# Altium PCB PCB_EPM7064SLC44_2.PCBDOC (part 1 of 2)
Units mil, origin at the board's own origin, x right, y up, seen from the top; angles counter-clockwise.
Board outline 2000 x 2000 mil, 2 copper layers (Top Layer, Bottom Layer); 30 components, 43 nets, 175 pads, 47 vias.
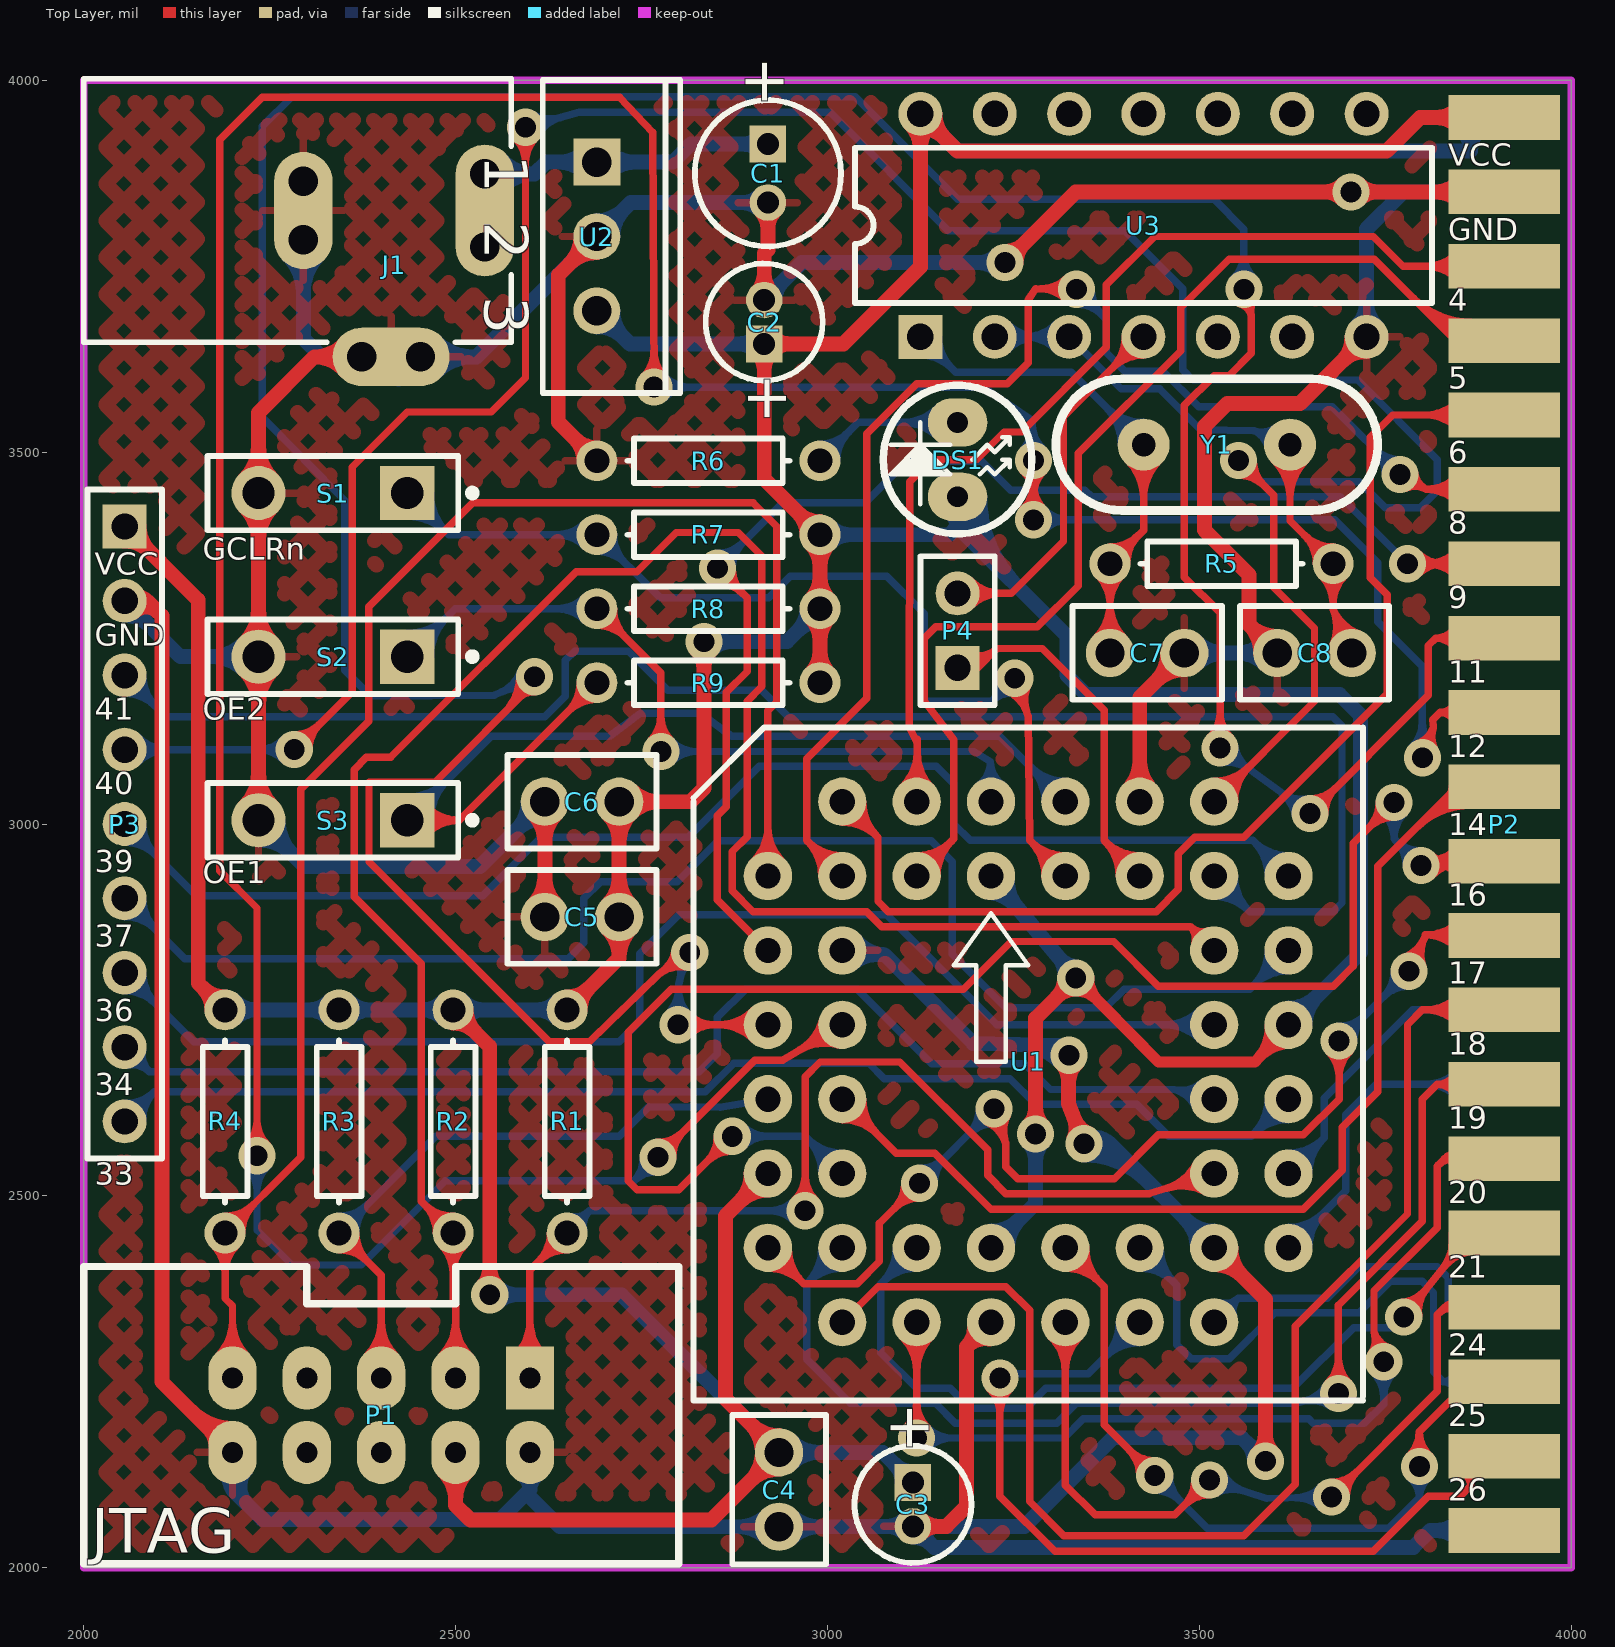
[diagram p0: Top Layer view]
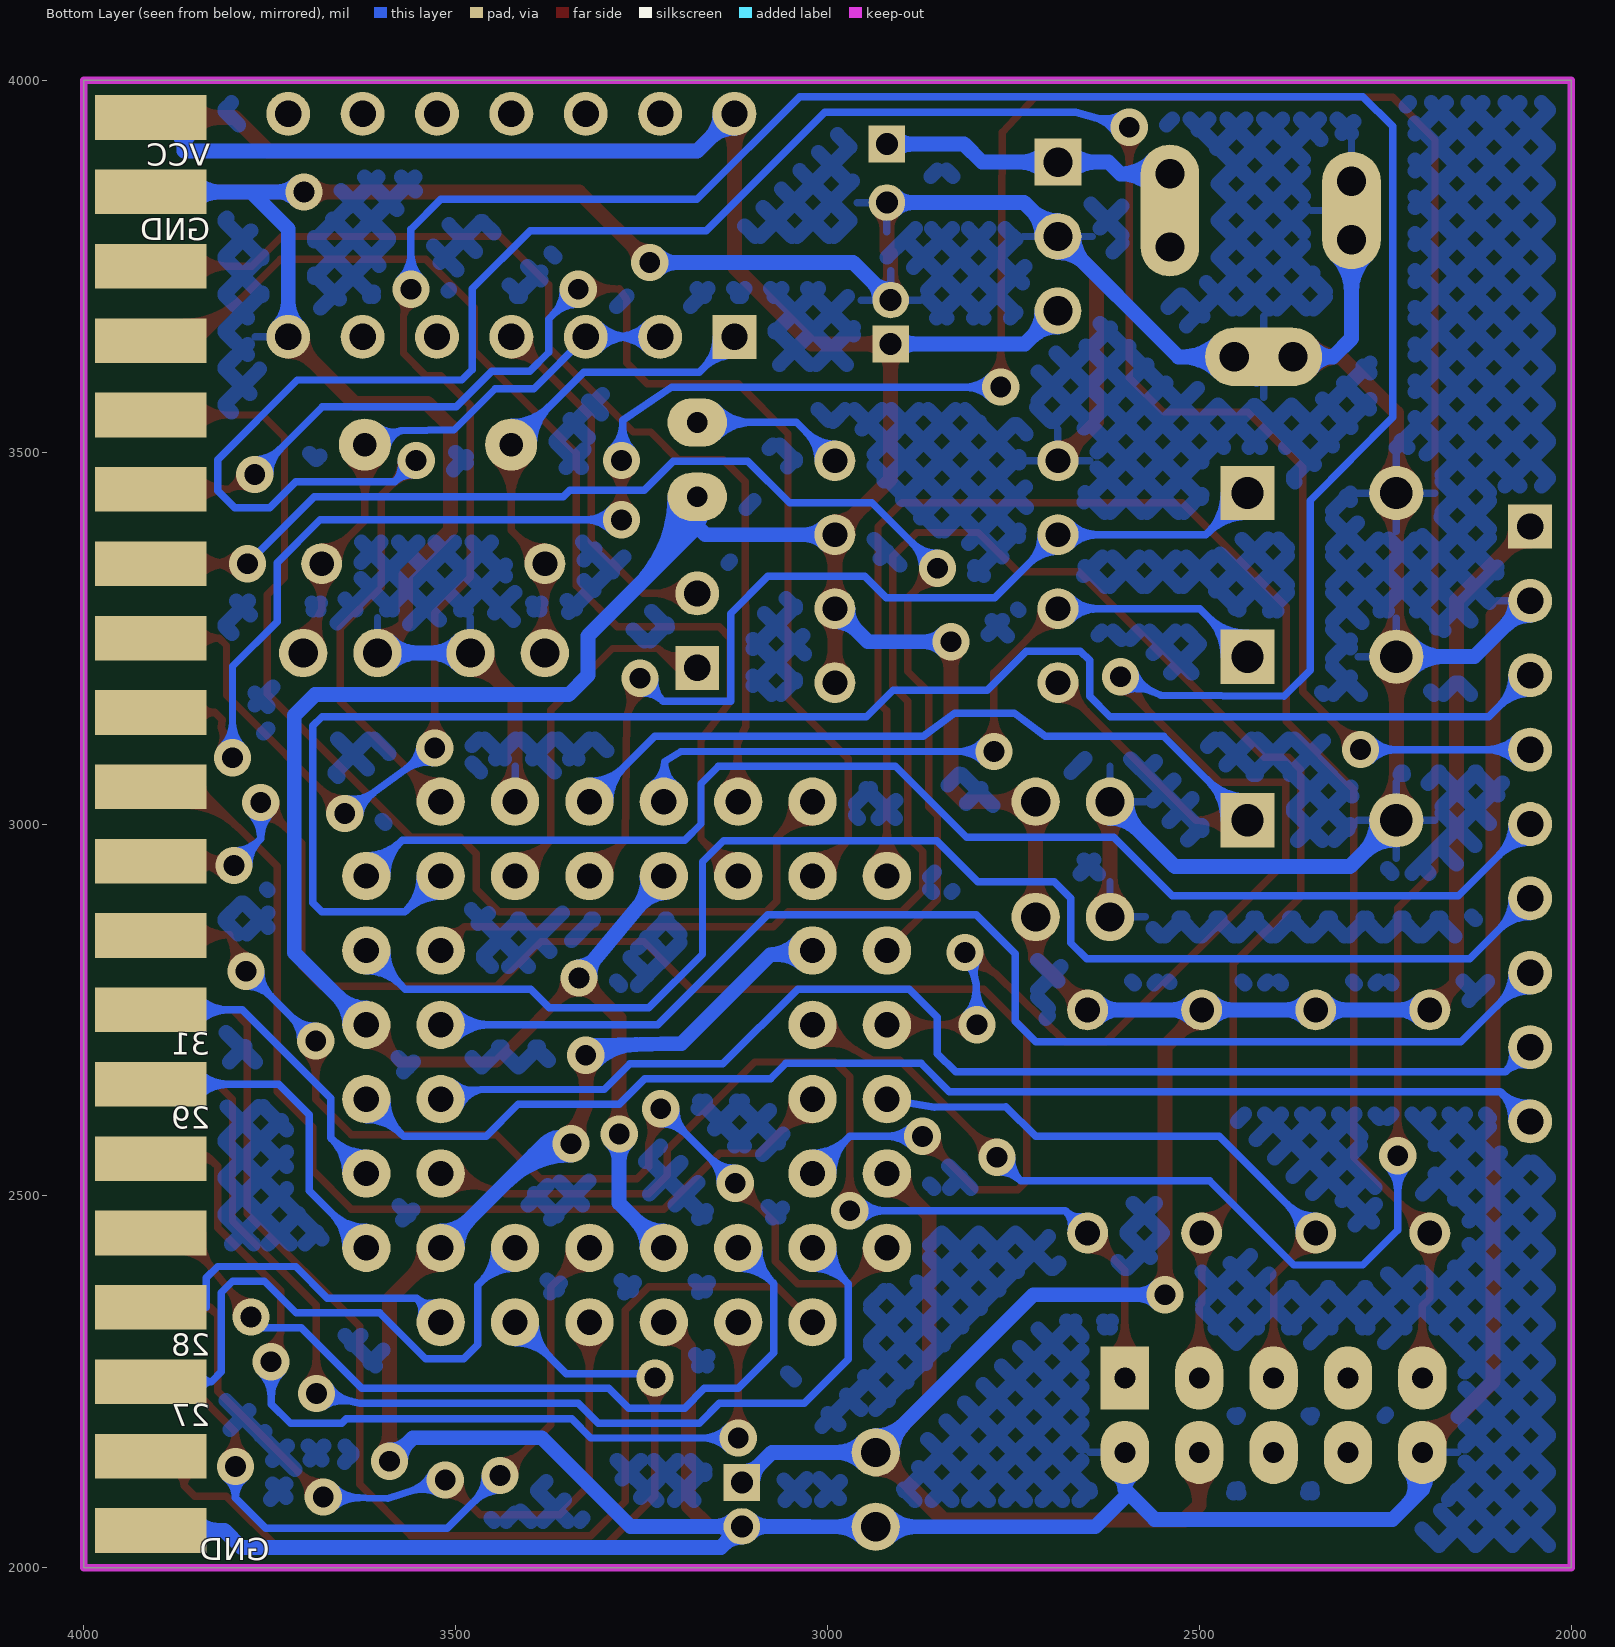
[diagram p1: Bottom Layer view, seen from below]

## Layer stack, top to bottom
Top Layer: signal copper 1.4
Dielectric: dielectric 12.6, FR-4, Dk 4.8
Bottom Layer: signal copper 1.4

## Board outline
2000,2000 2000,4000 4000,4000 4000,2000

## Design rules (kind name [scope] priority, off if disabled: settings)
Clearance [All] p1: gap=10
ComponentClearance [All] p1: gap=10 collisioncheckmode=0
PolygonConnect [All] p1: connectstyle=Relief reliefconductorwidth=10 reliefentries=4 polygonreliefangle="90 Angle"
RoutingPriority RoutingPriority_2 [InNet('VCC')] p1: routingpriority=50
RoutingPriority RoutingPriority_1 [InNet('GND')] p2: routingpriority=60
RoutingPriority [All] p3: routingpriority=0
RoutingVias [All] p1: holewidth=28 width=50 viastyle="Through Hole" minholewidth=28 minwidth=50 maxholewidth=28 maxwidth=50
SolderMaskExpansion [All] p1: expansion=4
TestPointUsage [All] p1: valid=0 allowmultiple=FALSE
Testpoint [All] p1: side=15 testpointundercomponent=TRUE minsize=40 maxsize=100 preferedsize=60 minholesize=0 maxholesize=40 preferedholesize=32 testpointgrid=1 style=1023 order=1234567890
Width Width_3 [InNet('NetC1_1')] p1: maxlimit=20 minlimit=20 preferedwidth=20
Width Width_2 [InNet('VCC')] p2: maxlimit=20 minlimit=10 preferedwidth=20
Width Width_1 [InNet('GND')] p3: maxlimit=20 minlimit=9 preferedwidth=20
Width [All] p4: maxlimit=10 minlimit=10 preferedwidth=10
16 further rules are at their usual default settings.

## Components (designator, comment, footprint, x,y, rotation, side; value= is the part's Value field where it differs from the comment)
C1 "470uF" CAPPR2-5x6.8 2920,3875 r270 top
C2 "22uF" CAPPR1.5-4x5 2915,3675 r90 top
C3 "10uF" CAPPR1.5-4x5 3115,2085 r270 top
C4 "0.1uF" CAPR2.54-5.1x3.2 2935,2105 r90 top
C5 "0.1uF" CAPR2.54-5.1x3.2 2670,2875 r0 top
C6 "0.1uF" CAPR2.54-5.1x3.2 2670,3030 r0 top
C7 "30pF" CAPR2.54-5.1x3.2 3430,3230 r180 top
C8 "30pF" CAPR2.54-5.1x3.2 3655,3230 r0 top
DS1 "LED_CPLD" LED 3175,3440 r90 top
J1 "POWER" KLD-0202 2000,3825 r0 top
P1 "JTAG" HEADER-5X2POL 2600,2255 r180 top
P2 "HEAD40" DBZ2 3910,2950 r90 top
P3 "Header 9" HDR1X9 2055,3400 r270 top
P4 "Header 2" HDR1X2 3175,3210 r90 top
R1 "1K" AXIAL-0.3 2650,2600 r270 top
R2 "1K" AXIAL-0.3 2496.67,2600 r270 top
R3 "1K" AXIAL-0.3 2343.33,2600 r270 top
R4 "1K" AXIAL-0.3 2190,2600 r270 top
R5 "1M" AXIAL-0.3 3530,3350 r0 top
R6 "340" AXIAL-0.3 2840,3488.46 r180 top
R7 "1K" AXIAL-0.3 2840,3388.98 r0 top
R8 "1K" AXIAL-0.3 2840,3289.49 r0 top
R9 "1K" AXIAL-0.3 2840,3190 r0 top
S1 "SW-PB" SPST-2 2335,3445 r180 top
S2 "SW-PB" SPST-2 2335,3225 r180 top
S3 "SW-PB" SPST-2 2335,3005 r180 top
U1 "EPM7064SLC44-10" PLCC_44 3220,3030 r0 top
U2 "7805" KC03 2690,3790 r270 top
U3 "SN74LS04N" N014 3425,3805 r0 top
Y1 "1~20M" XT2 3425,3510 r0 top

## Footprints (in the part's own frame and the unit in brackets; to place one, negate y for a bottom-side part, rotate by r counter-clockwise, add the part's x,y. Pads: shape width x height; smd on the part's side, far side on the other; paste and mask are expansions set on the pad)
AXIAL-0.3 [mm] "Resistor; 2 Leads"
  round 1.4 hole 0.85: 1(-3.81,0) 2(3.81,0)
  silkscreen extent -2.77,-0.76 2.77,0.76
CAPPR1.5-4x5 [mm] "Capacitor, Electrolytic, Radial; Body 4 x 5 mm (Dia.xH typ); Pin Spacing 1.5 mm (typ)"
  rect 1.25x1.25 hole 0.75: 1(-0.75,0)
  round 1.25 hole 0.75: 2(0.75,0)
  silkscreen extent -2,-2 2,2
CAPPR2-5x6.8 [mm] "Capacitor, Electrolytic, Radial; Body 5 x 6.8 mm (Dia.xH typ); Pin Spacing 2 mm (typ)"
  rect 1.25x1.25 hole 0.75: 1(-1,0)
  round 1.25 hole 0.75: 2(1,0)
  silkscreen extent -2.5,-2.5 2.5,2.5
CAPR2.54-5.1x3.2 [mm] "Capacitor, Ceramic, Thru-Hole, Dipped Radial; Body 5.1 x 3.2 mm (WxT) Pin Spacing 2.54 mm (typ)"
  round 1.65 hole 1: 1(-1.27,0) 2(1.27,0)
  silkscreen extent -2.55,-1.6 2.55,1.6
DBZ2 [mil]
  rect 60x150 smd: 1(1000,0) 2(900,0) 3(800,0) 4(700,0) 5(600,0) 6(500,0) 7(400,0) 8(300,0) 9(200,0) 10(100,0) 11(0,0) 12(-100,0) 13(-200,0) 14(-300,0) 15(-400,0) 16(-500,0) 17(-600,0) 18(-700,0) 19(-800,0) 20(-900,0)
  rect 60x150 smd far side: 21(1000,0) 22(900,0) 23(800,0) 24(700,0) 25(600,0) 26(500,0) 27(400,0) 28(300,0) 29(200,0) 30(100,0) 31(0,0) 32(-100,0) 33(-200,0) 34(-300,0) 35(-400,0) 36(-500,0) 37(-600,0) 38(-700,0) 39(-800,0) 40(-900,0)
HDR1X2 [mm] "Connector; Header; 2 Position"
  rect 1.5x1.5 hole 0.9: 1(0,0)
  round 1.5 hole 0.9: 2(2.54,0)
  silkscreen extent -1.27,-1.27 3.81,1.27
HDR1X9 [mm] "Connector; Header; 9 Position"
  rect 1.5x1.5 hole 0.9: 1(0,0)
  round 1.5 hole 0.9: 2(2.54,0) 3(5.08,0) 4(7.62,0) 5(10.16,0) 6(12.7,0) 7(15.24,0) 8(17.78,0) 9(20.32,0)
  silkscreen extent -1.27,-1.27 21.59,1.27
HEADER-5X2POL [mil]
  rect 65x85 hole 28: 1(0,0)
  oval 65x85 hole 28: 2(0,100) 3(100,0) 4(100,100) 5(200,0) 6(200,100) 7(300,0) 8(300,100) 9(400,0) 10(400,100)
  silkscreen extent -200,-150 600,250
KC03 [mm] "TO, Thru-Hole, Vertical, Heatsink Mounted; 3 In-Line Leads; Pitch 2.54 mm"
  rect 1.6x1.6 hole 1: 1(-2.54,0)
  round 1.6 hole 1: 2(0,0) 3(2.54,0)
  silkscreen extent -5.35,-1.85 5.35,2.85
KLD-0202 [mm] "DC Power Jack, 2.5mm, KLD Series, PCB Mount"
  oval 2x4.5 all layers, no hole: 1(13.7,0)
  round 1.5 hole 1: 1A(13.7,-1.25) 1B(13.7,1.25) 2A(7.5,-1) 2B(7.5,1) 3A(9.5,-5) 3B(11.5,-5)
  oval 2x4 all layers, no hole: 2(7.5,0)
  oval 4x2 all layers, no hole: 3(10.5,-5)
  silkscreen extent 0,-4.5 14.6,4.5
LED [mil]
  oval 65x80 hole 28: 1(0,0) 2(100,0)
  silkscreen extent -50,-100 150,100
N014 [mm] "DIP; 14 Leads; Row Spacing 7.62 mm; Pitch 2.54 mm"
  rect 1.5x1.5 hole 0.9: 1(-7.62,-3.81)
  round 1.5 hole 0.9: 2(-5.08,-3.81) 3(-2.54,-3.81) 4(0,-3.81) 5(2.54,-3.81) 6(5.08,-3.81) 7(7.62,-3.81) 8(7.62,3.81) 9(5.08,3.81) 10(2.54,3.81) 11(0,3.81) 12(-2.54,3.81) 13(-5.08,3.81) 14(-7.62,3.81)
  silkscreen extent -9.85,-2.65 9.85,2.65
PLCC_44 [mil]
  round 65 hole 34: 1(100,-100) 2(0,0) 3(0,-100) 4(-100,0) 5(-100,-100) 6(-200,0) 7(-300,-100) 8(-200,-100) 9(-300,-200) 10(-200,-200) 11(-300,-300) 12(-200,-300) 13(-300,-400) 14(-200,-400) 15(-300,-500) 16(-200,-500) 17(-300,-600) 18(-200,-700) 19(-200,-600) 20(-100,-700) 21(-100,-600) 22(0,-700) 23(0,-600) 24(100,-700) 25(100,-600) 26(200,-700) 27(200,-600) 28(300,-700) 29(400,-600) 30(300,-600) 31(400,-500) 32(300,-500) 33(400,-400) 34(300,-400) 35(400,-300) 36(300,-300) 37(400,-200) 38(300,-200) 39(400,-100) 40(300,0) 41(300,-100) 42(200,0) 43(200,-100) 44(100,0)
  silkscreen extent -400,-805 500,100
SPST-2 [mm] "Circuit Breaker; 2 Leads"
  rect 1.85x1.85 hole 1.1: 1(-2.54,0)
  round 1.85 hole 1.1: 2(2.54,0)
  silkscreen extent -4.89,-1.27 4.28,1.27
XT2 [mil]
  round 70 hole 31.5: 1(0.19,0.09) 2(197.04,0.09)
  silkscreen extent -118,-88 315,89

## Part data
C1 C2 C3: library part "Cap Pol1", "Polarized Capacitor (Radial)"
C4 C5 C6 C7 C8: library part Cap, "Capacitor"
DS1: library part LED0, "Typical INFRARED GaAs LED"
J1: library part PWR2.5, "Low Voltage Power Supply Connector"
P1: library part "Header 5X2", "Header, 5-Pin, Dual row"
P3: "Header, 9-Pin"
P4: "Header, 2-Pin"
R1 R2 R3 R4 R5 R6 R7 R8 R9: library part Res1, "Resistor"
S1 S2 S3: "Switch"
U1: "MAX 7000S 5V In-System Programmable CPLD, 64 Macrocells, 44-Pin PLCC, Speed Grade 10, Commercial Grade"
U2: library part LM330KC, "3-Terminal Positive Regulator"
U3: "Hex Inverter"
Y1: library part XTAL, "Crystal Oscillator"

## Via types
v1: diameter 50, hole 28, Top Layer to Bottom Layer, 47 vias

## Nets (pads, with @x,y where several pads share a name; then routed paths per layer and width w, separated by ;. In a path a pad name is that pad's centre, name@x,y a point inside that pad or via, vN(x,y) a via of type N, cw(c..) or ccw(c..) an arc to the next point about the centre after c; other vN are vias at no path point)
4: P2.3 U1.4 | length 1765
  Top Layer w10: U1.4@3100.79,3049.68 ccw(c3054.4,3097.18) 3120.79,3096.39 ccw(c3187.18,3095.6) U1.4@3139.68,3049.21 ; U1.4@3107.77,3042.52 ccw(c3078.26,3072.75) 3120.5,3072.25 ccw(c3162.75,3071.74) U1.4@3132.52,3042.23 ; U1.4@3120,3030 3120.95,3109.99 3121,3114 3120,3110 3110,3131 3110.47,3460.47 3140,3490 3200.35,3490 3237.44,3527.09 3261.09,3527.09 3375,3641 3375,3725 3440,3790 3734,3790 3774,3750 P2.3@3910,3750 ; P2.3@3847.32,3732.32 ccw(c3804.64,3689.64) 3804.64,3750 ccw(c3804.64,3810.36) P2.3@3847.32,3767.68 ; P2.3@3854.39,3739.39 ccw(c3828.79,3713.79) 3828.79,3750 ccw(c3828.79,3786.21) P2.3@3854.39,3760.61
5: P2.4 U1.5 | length 1898.5
  Top Layer w10: U1.5@3120,2930 3170,2980 3170,3113 3130.47,3165 3130.47,3250 3145.47,3265 3282.44,3265 3337.44,3320 3337.44,3498.44 3475,3636 3475,3694.53 3540,3759.53 3735.47,3759.53 3845,3650 P2.4@3910,3650 ; U1.5@3120,2947.5 ccw(c3120,2989.75) 3149.87,2959.87 ccw(c3179.75,2930) U1.5@3137.5,2930 ; U1.5@3120,2957.5 ccw(c3120,3023.89) 3166.95,2976.95 ccw(c3213.89,2930) U1.5@3147.5,2930 ; 3788.18,3706.82 ccw(c3865,3783.64) P2.4@3865,3675 ; 3805.25,3689.75 ccw(c3865,3749.5) P2.4@3865,3665 ; 3822.32,3672.68 ccw(c3865,3715.36) P2.4@3865,3655
6: P2.5 U1.6 | length 1863.5
  Top Layer w10: U1.6@3020,3002.5 cw(c3020,2936.11) 3066.95,2983.05 cw(c3113.89,3030) U1.6@3047.5,3030 ; U1.6@3020,3012.5 cw(c3020,2970.25) 3049.87,3000.13 cw(c3079.75,3030) U1.6@3037.5,3030 ; U1.6@3020,3030 3068,2982 3068,2896 3082,2882 3442,2882 3472,2912 3472,2960 3494,2982 3560,2982 3753,3175 3753,3308 3730,3331 3730,3520 3760,3550 P2.5@3910,3550 ; P2.5@3847.32,3532.32 ccw(c3804.64,3489.64) 3804.64,3550 ccw(c3804.64,3610.36) P2.5@3847.32,3567.68 ; P2.5@3854.39,3539.39 ccw(c3828.79,3513.79) 3828.79,3550 ccw(c3828.79,3586.21) P2.5@3854.39,3560.61
8: P2.6 U1.8 | length 2377.6
  Top Layer w10: U1.8@2992.5,2930 ccw(c2926.11,2930) 2973.05,2976.95 ccw(c3020,3023.89) U1.8@3020,2957.5 ; U1.8@3002.5,2930 ccw(c2960.25,2930) 2990.13,2959.87 ccw(c3020,2989.75) U1.8@3020,2947.5 ; U1.8@3020,2930 2972,2978 2972,3088 3053,3169 3053,3525 3120,3592 3242,3592 3270,3620 3270,3705 3280,3720 v1(3335,3719) ; v1@3320.6,3705.12 ccw(c3285.85,3671.6) 3286.72,3719.88 ccw(c3287.6,3768.15) v1@3321.12,3733.4 ; v1(3770,3470) 3805,3450 ; v1@3777.83,3451.59 cw(c3789.81,3423.41) 3805,3450 ; v1@3789.83,3472.6 ccw(c3820.19,3476.59) 3805,3450 ; P2.6@3847.25,3432.4 ccw(c3805,3390.51) 3805,3450 ; P2.6@3847.25,3467.6 cw(c3805,3509.49) 3805,3450 ; P2.6@3854.35,3439.44 ccw(c3829,3414.3) 3829,3450 ccw(c3829,3485.7) P2.6@3854.35,3460.56 ; P2.6@3910,3450 3805,3450
  Bottom Layer w10: v1@3335,3699 cw(c3335,3650.72) 3369.14,3684.86 cw(c3403.28,3719) v1@3355,3719 ; v1(3335,3719) 3375,3679 3375,3634 3400,3609 3451.29,3609 3499.29,3561 3679,3561 v1(3770,3470) ; v1@3750,3470 ccw(c3701.72,3470) 3735.86,3504.14 ccw(c3770,3538.28) v1@3770,3490
9: P2.7 U1.9 | length 2129.3
  Top Layer w10: v1@2852,3324 cw(c2852,3275.72) 2886.14,3309.86 cw(c2920.28,3344) v1@2872,3344 ; v1(2852,3344) 2892,3304 2892,3205.11 2863.97,3177.07 2863.97,3022.96 2852,3010.99 2852,2898 U1.9@2920,2830 ; v1(3780,3350) P2.7@3910,3350 ; v1@3794.14,3335.86 cw(c3828.28,3301.72) 3828.28,3350 cw(c3828.28,3398.28) v1@3794.14,3364.14 ; P2.7@3847.32,3332.32 ccw(c3804.64,3289.64) 3804.64,3350 ccw(c3804.64,3410.36) P2.7@3847.32,3367.68 ; P2.7@3854.39,3339.39 ccw(c3828.79,3313.79) 3828.79,3350 ccw(c3828.79,3386.21) P2.7@3854.39,3360.61
  Bottom Layer w10: v1(2852,3344) 2940,3432 3051,3432 3107,3488 3207.46,3488 3246.46,3449 3346.28,3449 3355.19,3440.09 3689.91,3440.09 v1(3780,3350) ; v1@2852,3364 ccw(c2852,3412.28) 2886.14,3378.14 ccw(c2920.28,3344) v1@2872,3344
11: P2.8 U1.11 | length 6101.3
  Top Layer w10: 2566.2,3150.2 ccw(c2518.4,3198) v1@2586,3198 ; 2583.27,3167.27 ccw(c2552.54,3198) v1@2596,3198 ; 2585.51,3169.51 cw(c2606,3149.03) v1@2606,3178 ; v1(2606,3198) 2606,3190 2472.42,3056.42 2383.58,3056.42 2383.58,2949.42 2626,2707 2680,2707 2773,2798 v1(2815,2827) ; v1@2795.33,2830.6 cw(c2747.83,2839.3) 2775.27,2799.57 cw(c2802.7,2759.83) v1@2811.4,2807.33 ; v1(2799,2730) U1.11@2920,2730 ; v1@2813.14,2715.86 cw(c2847.28,2681.72) 2847.28,2730 cw(c2847.28,2778.28) v1@2813.14,2744.14 ; U1.11@2900.55,2710.55 ccw(c2853.61,2663.61) 2853.61,2730 ccw(c2853.61,2796.39) U1.11@2900.55,2749.45 ; U1.11@2907.63,2717.63 ccw(c2877.75,2687.75) 2877.75,2730 ccw(c2877.75,2772.25) U1.11@2907.63,2742.37 ; v1@3513.86,3116.14 ccw(c3479.72,3150.28) 3528,3150.28 ccw(c3576.28,3150.28) v1@3542.14,3116.14 ; v1(3528,3102) 3528,3284 3480,3332 3480,3563 3520,3603 3540,3603 3570,3633 3570,3684 ; v1@3554.33,3699.82 cw(c3547.77,3677.65) 3570,3684 ; v1(3560,3719) 3570,3684 ; v1@3574.95,3705.71 ccw(c3592.23,3690.35) 3570,3684 ; v1(3649,3014) 3808,3173 3808,3240 3818,3250 ; v1@3649,3034 ccw(c3649,3082.28) 3683.14,3048.14 ccw(c3717.28,3014) v1@3669,3014 ; P2.8@3844.27,3236.03 ccw(c3818,3218.32) 3818,3250 ; P2.8@3844.27,3263.97 cw(c3818,3281.68) 3818,3250 ; P2.8@3910,3250 3818,3250
  Bottom Layer w10: v1@2587.23,3204.89 cw(c2541.9,3221.53) 2562.18,3177.71 cw(c2582.47,3133.9) v1@2599.11,3179.23 ; v1(2606,3198) 2552,3173 2386,3172 2351,3207 2351,3435 2240,3547 2240,3938 2280,3978 3037.32,3978 3175.32,3840 3520,3840 3560,3800 v1(3560,3719) ; v1@2785.12,2744.4 ccw(c2751.62,2779.17) 2799.89,2778.28 ccw(c2848.17,2777.38) v1@2813.4,2743.88 ; v1@2798.02,2816.43 cw(c2771.15,2799.7) 2801.98,2792.53 ; v1(2799,2730) 2800,2784 2810,2827 v1(2815,2827) ; 2802.12,2793.14 cw(c2841.83,2783.9) v1@2820.29,2818.51 ; v1(3528,3102) v1(3649,3014) ; v1@3531.12,3082.24 cw(c3538.65,3034.55) 3567.05,3073.6 cw(c3595.45,3112.65) v1@3547.76,3105.12 ; v1@3545.86,3733.14 ccw(c3511.72,3767.28) 3560,3767.28 ccw(c3608.28,3767.28) v1@3574.14,3733.14 ; v1@3629.24,3010.88 ccw(c3581.55,3003.35) 3609.95,3042.4 ccw(c3638.35,3081.45) v1@3645.88,3033.76
12: P2.9 U1.12 | length 6081
  Top Layer w10: v1@2218.86,2568.14 ccw(c2184.72,2602.28) 2233,2602.28 ccw(c2281.28,2602.28) v1@2247.14,2568.14 ; v1(2233,2554) 2233,2887 2183,2937 2183,3920 2240,3977 2721,3977 2765,3930 v1(2767,3587.5) ; v1@2752.78,3601.56 ccw(c2718.43,3635.5) 2766.72,3635.78 ccw(c2815,3636.07) v1@2781.06,3601.72 ; v1(2772,2552) 2902.5,2682.5 2939.68,2682.5 U1.12@3020,2730 ; v1@2772,2572 ccw(c2772,2620.28) 2806.14,2586.14 ccw(c2840.28,2552) v1@2792,2552 ; U1.12@2993.36,2736.84 cw(c2929.06,2753.35) 2962.85,2696.21 cw(c2996.65,2639.06) U1.12@3013.16,2703.36 ; U1.12@3003.05,2734.35 cw(c2962.13,2744.86) 2983.63,2708.49 cw(c3005.14,2672.13) U1.12@3015.65,2713.05 ; v1@3262.86,3423.14 ccw(c3228.72,3457.28) 3277,3457.28 ccw(c3325.28,3457.28) v1@3291.14,3423.14 ; v1@3262.86,3474.86 cw(c3228.72,3440.72) 3277,3440.72 cw(c3325.28,3440.72) v1@3291.14,3474.86 ; v1(3277,3409) v1(3277,3489) ; v1@3792.94,3107.71 ccw(c3779.65,3142.93) 3815,3130 ; v1(3800,3089) 3815,3130 ; v1@3817.47,3098.74 cw(c3850.35,3117.06) 3815,3130 ; P2.9@3842.77,3138.55 ccw(c3824,3128.88) 3824,3150 ; P2.9@3842.77,3161.45 cw(c3824,3171.12) 3824,3150 ; P2.9@3910,3150 3824,3150 ; 3815,3130 3814,3140 3824,3150
  Bottom Layer w10: v1@2218.86,2539.86 cw(c2184.72,2505.72) 2233,2505.72 cw(c2281.28,2505.72) v1@2247.14,2539.86 ; v1(2233,2554) 2233,2454 2280,2407 2373,2407 2486,2520 2740,2520 ; v1@2752.02,2551.06 cw(c2710.87,2549.13) 2740,2520 ; v1(2767,3587.5) 3209.5,3587.5 3275,3543 v1(3277,3489) ; v1@2771.06,2532.02 ccw(c2769.13,2490.87) 2740,2520 ; v1(2772,2552) 2740,2520 ; v1@2781.14,3573.36 cw(c2815.28,3539.22) 2815.28,3587.5 cw(c2815.28,3635.78) v1@2781.14,3601.64 ; v1@3262.34,3502.61 ccw(c3226.96,3535.46) 3275.21,3537.25 ccw(c3323.46,3539.04) v1@3290.61,3503.66 ; v1(3277,3409) 3682.24,3409 3740,3351.24 3740,3272 3800,3212 v1(3800,3089) ; v1@3291.14,3394.86 cw(c3325.28,3360.72) 3325.28,3409 cw(c3325.28,3457.28) v1@3291.14,3423.14 ; v1@3785.86,3103.14 ccw(c3751.72,3137.28) 3800,3137.28 ccw(c3848.28,3137.28) v1@3814.14,3103.14
14: P2.10 U1.14 | length 1769.7
  Top Layer w10: U1.14@3020,2602.5 cw(c3020,2536.11) 3066.95,2583.05 cw(c3113.89,2630) U1.14@3047.5,2630 ; U1.14@3020,2612.5 cw(c3020,2570.25) 3049.87,2600.13 cw(c3079.75,2630) U1.14@3037.5,2630 ; U1.14@3020,2630 3092.5,2557.5 3144.5,2557.5 3220,2482 3640,2482 3692.15,2534.15 3692.15,2592.15 3740,2640 3740,2943 3847,3050 P2.10@3910,3050 ; 3791.59,2994.59 cw(c3865,2921.19) P2.10@3865,3025 ; 3808.67,3011.67 cw(c3865,2955.33) P2.10@3865,3035 ; 3825.74,3028.74 cw(c3865,2989.47) P2.10@3865,3045 ; P2.10@3835.05,3038.05 ccw(c3823.1,3050) P2.10@3840,3050
16: P2.11 U1.16 | length 2874.7
  Top Layer w10: v1@2852,2580 cw(c2803.72,2580) 2837.86,2545.86 cw(c2872,2511.72) v1@2872,2560 ; v1(2872,2580) 2800,2508 2744,2508 2732,2520 2732,2720 2790,2778 3183,2778 3247,2842 3385,2842 3445,2782 3680,2782 3707,2809 3707,2974 v1(3762,3029) ; v1@3742,3029 cw(c3693.72,3029) 3727.86,2994.86 cw(c3762,2960.72) v1@3762,3009 ; v1(3798,2944) 3804,2950 P2.11@3910,2950 ; v1@3805.07,2936.93 cw(c3836.63,2905.37) P2.11@3836.63,2950 ; v1@3812.14,2929.86 cw(c3860.77,2881.23) P2.11@3860.77,2950 ; v1@3812.14,2958.14 ccw(c3831.8,2977.8) 3831.8,2950 ; P2.11@3847.32,2932.32 ccw(c3804.64,2889.64) 3804.64,2950 ccw(c3804.64,3010.36) P2.11@3847.32,2967.68 ; P2.11@3854.39,2939.39 ccw(c3828.79,2913.79) 3828.79,2950 ccw(c3828.79,2986.21) P2.11@3854.39,2960.61
  Bottom Layer w10: v1(2872,2580) 2970,2580 U1.16@3020,2530 ; v1@2886.14,2565.86 cw(c2920.28,2531.72) 2920.28,2580 cw(c2920.28,2628.28) v1@2886.14,2594.14 ; U1.16@2992.5,2530 ccw(c2926.11,2530) 2973.05,2576.95 ccw(c3020,2623.89) U1.16@3020,2557.5 ; U1.16@3002.5,2530 ccw(c2960.25,2530) 2990.13,2559.87 ccw(c3020,2589.75) U1.16@3020,2547.5 ; v1@3747.86,3014.86 cw(c3713.72,2980.72) 3762,2980.72 cw(c3810.28,2980.72) v1@3776.14,3014.86 ; v1(3762,3029) 3762,2980 v1(3798,2944) ; v1@3778,2944 ccw(c3729.72,2944) 3763.86,2978.14 ccw(c3798,3012.28) v1@3798,2964
17: P2.12 U1.17 | length 2329.9
  Top Layer w10: U1.17@2920,2402.5 cw(c2920,2336.11) 2966.95,2383.05 cw(c3013.89,2430) U1.17@2947.5,2430 ; U1.17@2920,2412.5 cw(c2920,2370.25) 2949.87,2400.13 cw(c2979.75,2430) U1.17@2937.5,2430 ; U1.17@2920,2430 2968,2382 3040,2382 3070,2412 3070,2463 v1(3124,2517) ; v1@3104,2517 cw(c3055.72,2517) 3089.86,2482.86 cw(c3124,2448.72) v1@3124,2497 ; v1@3215.17,2599.05 cw(c3193.85,2555.73) 3239.56,2571.29 cw(c3285.27,2586.85) v1@3241.95,2608.17 ; v1(3224,2617) 3240,2570 3240,2539 3256,2523 3386,2523 3445,2582 3640,2582 3688,2630 v1(3688,2708) ; v1@3673.86,2693.86 cw(c3639.72,2659.72) 3688,2659.72 cw(c3736.28,2659.72) v1@3702.14,2693.86 ; v1@3775.21,2820.81 ccw(c3758.81,2866.23) 3802.52,2845.71 ccw(c3846.23,2825.19) v1@3800.81,2808.79 ; v1(3782,2802) 3805,2851 P2.12@3910,2850 ; 3803.62,2851.01 cw(c3803.03,2789.2) P2.12@3847.15,2832.49 ; 3805.69,2850.99 ccw(c3806.25,2909.88) P2.12@3847.49,2867.85 ; 3827.76,2850.78 cw(c3827.4,2813.11) P2.12@3854.29,2839.49 ; 3829.83,2850.76 ccw(c3830.16,2885.51) P2.12@3854.49,2860.71
  Bottom Layer w10: v1(3124,2517) v1(3224,2617) ; v1@3124,2537 ccw(c3124,2585.28) 3158.14,2551.14 ccw(c3192.28,2517) v1@3144,2517 ; v1@3204,2617 cw(c3155.72,2617) 3189.86,2582.86 cw(c3224,2548.72) v1@3224,2597 ; v1(3688,2708) v1(3782,2802) ; v1@3688,2728 ccw(c3688,2776.28) 3722.14,2742.14 ccw(c3756.28,2708) v1@3708,2708 ; v1@3762,2802 cw(c3713.72,2802) 3747.86,2767.86 cw(c3782,2733.72) v1@3782,2782
18: P2.13 U1.18 | length 1917.3
  Top Layer w10: U1.18@3020,2330 3068,2378 3240,2378 3272,2346 3272,2089 3318,2043 3560,2043 3629,2112 3629,2324.63 3780,2475.63 3780,2730 3800,2750 P2.13@3910,2750 ; P2.13@3847.32,2732.32 ccw(c3804.64,2689.64) 3804.64,2750 ccw(c3804.64,2810.36) P2.13@3847.32,2767.68 ; P2.13@3854.39,2739.39 ccw(c3828.79,2713.79) 3828.79,2750 ccw(c3828.79,2786.21) P2.13@3854.39,2760.61
19: P2.14 U1.19 | length 1873
  Top Layer w10: v1@3673.05,2248.34 ccw(c3638.91,2282.48) 3687.2,2282.48 ccw(c3735.48,2282.48) v1@3701.34,2248.34 ; v1(3687.2,2234.2) 3687.2,2352.8 3800,2465.61 3800,2630 3820,2650 ; P2.14@3843.77,2636.79 ccw(c3820,2622) 3820,2650 ; P2.14@3843.77,2663.21 cw(c3820,2678) 3820,2650 ; P2.14@3910,2650 3820,2650
  Bottom Layer w10: U1.19@2992.5,2430 cw(c2926.11,2430) 2973.05,2383.05 cw(c3020,2336.11) U1.19@3020,2402.5 ; U1.19@3002.5,2430 cw(c2960.25,2430) 2990.13,2400.13 cw(c3020,2370.25) U1.19@3020,2412.5 ; U1.19@3020,2430 2972,2382 2972,2280 3031,2221 3145.38,2221 3172,2194.38 3308.21,2194.38 3334.83,2221 3629,2221 v1(3687.2,2234.2) ; v1@3670.28,2244.86 cw(c3629.43,2270.61) 3640.11,2223.52 cw(c3650.78,2176.43) v1@3676.53,2217.28
20: P2.15 U1.20 | length 1834.2
  Top Layer w10: U1.20@3100.55,2310.55 cw(c3053.61,2263.61) 3120,2263.61 cw(c3186.39,2263.61) U1.20@3139.45,2310.55 ; v1@3105.86,2188.52 ccw(c3071.72,2222.67) 3120,2222.67 ccw(c3168.28,2222.67) v1@3134.14,2188.52 ; U1.20@3107.63,2317.63 cw(c3077.75,2287.75) 3120,2287.75 cw(c3162.25,2287.75) U1.20@3132.37,2317.63 ; v1(3120,2174.38) U1.20@3120,2330 ; v1@3731.2,2287.85 ccw(c3702.46,2306.42) 3735,2317 ; v1(3748,2277) 3735,2317 ; v1@3755.21,2295.66 cw(c3767.55,2327.58) 3735,2317 ; 3820.59,2540.59 cw(c3844.78,2516.4) P2.15@3862.42,2545.72 ; 3829.64,2549.64 cw(c3851.58,2527.69) P2.15@3867.58,2554.28 ; P2.15@3841.35,2541.89 ccw(c3830,2538) 3830,2550 ; P2.15@3841.35,2558.11 cw(c3830,2562) 3830,2550 ; P2.15@3910,2550 3830,2550 ; 3735,2317 3735,2372.32 3820,2457.32 3820,2540 3830,2550
  Bottom Layer w10: v1(3120,2174.38) 3318.21,2174.38 3343.83,2200 3647,2200 3653,2194 3722,2194 3748,2220 v1(3748,2277) ; v1@3134.14,2160.24 cw(c3168.28,2126.1) 3168.28,2174.38 cw(c3168.28,2222.67) v1@3134.14,2188.52 ; v1@3733.86,2262.86 cw(c3699.72,2228.72) 3748,2228.72 cw(c3796.28,2228.72) v1@3762.14,2262.86
21: P2.16 U1.21 | length 1566.6
  Top Layer w10: v1@3772.86,2356.89 ccw(c3767.7,2404.89) 3805.3,2374.6 ccw(c3842.89,2344.3) v1@3794.89,2339.14 ; v1(3775,2337) 3840,2417.66 3840,2450 P2.16@3910,2450 ; 3826.52,2400.93 ccw(c3777.32,2440.57) P2.16@3840.14,2447.33 ; 3829.03,2404.04 cw(c3873.82,2367.94) P2.16@3867.67,2425.14 ; 3841.67,2419.73 ccw(c3811.27,2444.22) P2.16@3850.09,2448.4 ; P2.16@3842.73,2438.63 cw(c3826.13,2430.16) 3840.65,2418.46 cw(c3856.16,2405.96) P2.16@3860.08,2425.49
  Bottom Layer w10: U1.21@3092.5,2430 cw(c3026.11,2430) 3073.05,2383.05 cw(c3120,2336.11) U1.21@3120,2402.5 ; U1.21@3102.5,2430 cw(c3060.25,2430) 3090.13,2400.13 cw(c3120,2370.25) U1.21@3120,2412.5 ; U1.21@3120,2430 3072,2382 3072,2289 3120,2241 3165.38,2241 3192,2214.38 3267.21,2214.38 3293.83,2241 3626,2241 3707.5,2322.5 3760.5,2322.5 v1(3775,2337)
24: P2.17 U1.24 | length 1605.4
  Top Layer w10: U1.24@3300.55,2310.55 cw(c3253.61,2263.61) 3320,2263.61 cw(c3386.39,2263.61) U1.24@3339.45,2310.55 ; U1.24@3307.63,2317.63 cw(c3277.75,2287.75) 3320,2287.75 cw(c3362.25,2287.75) U1.24@3332.37,2317.63 ; U1.24@3320,2330 3320,2111 3360,2071 3467,2071 v1(3514,2118) ; v1@3494,2118 cw(c3445.72,2118) 3479.86,2083.86 cw(c3514,2049.72) v1@3514,2098 ; v1(3678,2095) 3820,2237 3820,2340 3830,2350 ; v1@3678,2115 ccw(c3678,2163.28) 3712.14,2129.14 ccw(c3746.28,2095) v1@3698,2095 ; 3820.59,2340.59 cw(c3844.78,2316.4) P2.17@3862.42,2345.72 ; 3829.64,2349.64 cw(c3851.58,2327.69) P2.17@3867.58,2354.28 ; P2.17@3841.35,2341.89 ccw(c3830,2338) 3830,2350 ; P2.17@3841.35,2358.11 cw(c3830,2362) 3830,2350 ; P2.17@3910,2350 3830,2350
  Bottom Layer w10: v1(3514,2118) 3591,2093 v1(3678,2095) ; v1@3523.08,2100.18 cw(c3545.01,2057.17) 3559.92,2103.09 cw(c3574.83,2149.01) v1@3531.82,2127.08 ; v1@3663.54,2108.81 cw(c3628.62,2142.16) 3629.73,2093.89 cw(c3630.84,2045.62) v1@3664.19,2080.54
25: P2.18 U1.25 | length 1444.6
  Top Layer w10: U1.25@3320,2402.5 cw(c3320,2336.11) 3366.95,2383.05 cw(c3413.89,2430) U1.25@3347.5,2430 ; U1.25@3320,2412.5 cw(c3320,2370.25) 3349.87,2400.13 cw(c3379.75,2430) U1.25@3337.5,2430 ; U1.25@3320,2430 3372,2378 3372,2192 v1(3440.08,2123.92) ; v1@3420.08,2123.92 ccw(c3371.79,2123.92) 3405.93,2158.07 ccw(c3440.08,2192.21) v1@3440.08,2143.92 ; v1@3782.13,2150.41 ccw(c3750.78,2183) 3796,2183 ; v1(3796,2136) 3796,2183 ; v1@3809.87,2150.41 cw(c3841.22,2183) 3796,2183 ; P2.18@3910,2250 3863,2250 3796,2183
  Bottom Layer w10: v1@3440.08,2103.92 cw(c3440.08,2055.64) 3474.22,2089.78 cw(c3508.36,2123.92) v1@3460.08,2123.92 ; v1(3440.08,2123.92) 3511,2053 3755,2053 3796,2094 ; v1@3783.39,2120.47 cw(c3761.9,2094) 3796,2094 ; v1(3796,2136) 3796,2094 ; v1@3808.61,2120.47 ccw(c3830.1,2094) 3796,2094
26: P2.19 U1.26 | length 1453.2
  Top Layer w10: v1@3217.86,2240.86 cw(c3183.72,2206.72) 3232,2206.72 cw(c3280.28,2206.72) v1@3246.14,2240.86 ; v1(3232,2255) 3232,2096 3306,2022 3734.11,2022 3808.11,2096 3851,2096 3865,2110 ; P2.19@3854.05,2127.53 cw(c3845.5,2110) 3865,2110 ; P2.19@3875.95,2127.53 ccw(c3884.5,2110) 3865,2110 ; P2.19@3910,2150 3865,2150 3865,2110
  Bottom Layer w10: v1(3232,2255) 3238,2261 3351,2261 U1.26@3420,2330 ; U1.26@3392.5,2330 cw(c3326.11,2330) 3373.05,2283.05 cw(c3420,2236.11) U1.26@3420,2302.5 ; U1.26@3402.5,2330 cw(c3360.25,2330) 3390.13,2300.13 cw(c3420,2270.25) U1.26@3420,2312.5
27: P2.38 U1.27 | length 965.5
  Bottom Layer w10: U1.27@3420,2402.5 cw(c3420,2336.11) 3466.95,2383.05 cw(c3513.89,2430) U1.27@3447.5,2430 ; U1.27@3420,2412.5 cw(c3420,2370.25) 3449.87,2400.13 cw(c3479.75,2430) U1.27@3437.5,2430 ; U1.27@3420,2430 3470,2380 3470,2300 3489,2281 3540.42,2281 3601.92,2342.5 3714.49,2342.5 3756.99,2385 3800,2385 3815,2370 3815,2263.22 3828.22,2250 ; P2.38@3841.75,2240.8 ccw(c3828.22,2235.44) 3828.22,2250 ; P2.38@3841.75,2259.2 cw(c3828.22,2264.56) 3828.22,2250 ; P2.38@3910,2250 3828.22,2250
28: P2.37 U1.28 | length 520.5
  Bottom Layer w10: U1.28@3520,2330 3552.5,2362.5 ; U1.28@3527.94,2356.33 ccw(c3535.06,2379.93) 3552.5,2362.5 ; U1.28@3546.33,2337.94 cw(c3569.93,2345.06) 3552.5,2362.5 ; P2.37@3910,2350 3835,2350 3835,2390 3820,2405 3715,2405 3672.5,2362.5 3552.5,2362.5
29: P2.34 U1.29 | length 763.4
  Bottom Layer w10: U1.29@3620,2430 3697,2507 3697,2609.28 3737.72,2650 P2.34@3910,2650 ; U1.29@3620,2447.5 ccw(c3620,2489.75) 3649.87,2459.87 ccw(c3679.75,2430) U1.29@3637.5,2430 ; U1.29@3620,2457.5 ccw(c3620,2523.89) 3666.95,2476.95 ccw(c3713.89,2430) U1.29@3647.5,2430 ; P2.34@3847.32,2632.32 ccw(c3804.64,2589.64) 3804.64,2650 ccw(c3804.64,2710.36) P2.34@3847.32,2667.68 ; P2.34@3854.39,2639.39 ccw(c3828.79,2613.79) 3828.79,2650 ccw(c3828.79,2686.21) P2.34@3854.39,2660.61
31: P2.33 U1.31 | length 734.6
  Bottom Layer w10: U1.31@3620,2530 3668,2578 3668,2631.2 3786.8,2750 P2.33@3910,2750 ; U1.31@3620,2547.5 ccw(c3620,2589.75) 3649.87,2559.87 ccw(c3679.75,2530) U1.31@3637.5,2530 ; U1.31@3620,2557.5 ccw(c3620,2623.89) 3666.95,2576.95 ccw(c3713.89,2530) U1.31@3647.5,2530 ; P2.33@3847.32,2732.32 ccw(c3804.64,2689.64) 3804.64,2750 ccw(c3804.64,2810.36) P2.33@3847.32,2767.68 ; P2.33@3854.39,2739.39 ccw(c3828.79,2713.79) 3828.79,2750 ccw(c3828.79,2786.21) P2.33@3854.39,2760.61
33: P3.9 U1.33 | length 1967.3
  Bottom Layer w10: P3.9@2055,2600 2095,2640 ; P3.9@2055.48,2614.52 ccw(c2056.51,2645.87) 2078.69,2623.69 ccw(c2100.87,2601.51) P3.9@2069.52,2600.48 ; P3.9@2055.81,2624.51 ccw(c2057.55,2677.45) 2095,2640 ; P3.9@2079.51,2600.81 cw(c2132.45,2602.55) 2095,2640 ; U1.33@3592.5,2630 cw(c3526.11,2630) 3573.05,2583.05 cw(c3620,2536.11) U1.33@3620,2602.5 ; U1.33@3602.5,2630 cw(c3560.25,2630) 3590.13,2600.13 cw(c3620,2570.25) U1.33@3620,2612.5 ; U1.33@3620,2630 3570,2580 3459,2580 3416,2623 3280,2623 3245.5,2657.5 3076.48,2657.5 3055.98,2678 2874,2678 2836,2640 2095,2640
34: P3.8 U1.34 | length 1801.1
  Bottom Layer w10: P3.8@2055,2700 2088.32,2666.68 ; P3.8@2059.26,2675.84 cw(c2064.98,2643.34) 2088.32,2666.68 ; P3.8@2079.16,2695.74 ccw(c2111.66,2690.02) 2088.32,2666.68 ; U1.34@3494.8,2618.99 ccw(c3456.31,2602.16) 3466.17,2643 ; U1.34@3502.6,2651.3 cw(c3476.03,2683.84) 3466.17,2643 ; U1.34@3503.96,2622.99 ccw(c3479.47,2612.28) 3485.74,2638.27 ccw(c3492.02,2664.26) U1.34@3508.93,2643.55 ; U1.34@3520,2630 3466.16,2643 ; 2088.32,2666.68 2827.6,2666.68 2852.09,2691.17 2852.09,2740.09 2890,2778 3040,2778 3140.5,2677.5 3265.5,2677.5 3300,2643 3466.16,2643
36: P3.7 U1.36 | length 2007.7
  Bottom Layer w10: P3.7@2055,2775.47 cw(c2055,2716.26) 2096.87,2758.13 cw(c2138.74,2800) P3.7@2079.53,2800 ; P3.7@2055,2785.47 cw(c2055,2750.4) 2079.8,2775.2 cw(c2104.6,2800) P3.7@2069.53,2800 ; P3.7@2055,2800 2148,2707 2720,2707 2747.6,2734.6 2747.6,2825.6 2800,2878 3080,2878 3228,2730 U1.36@3520,2730 ; U1.36@3500.55,2710.55 ccw(c3453.61,2663.61) 3453.61,2730 ccw(c3453.61,2796.39) U1.36@3500.55,2749.45 ; U1.36@3507.63,2717.63 ccw(c3477.75,2687.75) 3477.75,2730 ccw(c3477.75,2772.25) U1.36@3507.63,2742.37
37: P3.6 U1.37 | length 2215.7
  Bottom Layer w10: P3.6@2055,2875.47 cw(c2055,2816.26) 2096.87,2858.13 cw(c2138.74,2900) P3.6@2079.53,2900 ; P3.6@2055,2885.47 cw(c2055,2850.4) 2079.8,2875.2 cw(c2104.6,2900) P3.6@2069.53,2900 ; P3.6@2055,2900 2136,2819 2651.52,2819 2672.52,2840 2672.52,2900 2695,2922.48 2797.98,2922.48 2853,2977.5 3139.68,2977.5 3168,2949.18 3168,2825 3240,2753 3374,2753 3399,2778 3568,2778 U1.37@3620,2830 ; U1.37@3592.5,2830 cw(c3526.11,2830) 3573.05,2783.05 cw(c3620,2736.11) U1.37@3620,2802.5 ; U1.37@3602.5,2830 cw(c3560.25,2830) 3590.13,2800.13 cw(c3620,2770.25) U1.37@3620,2812.5
39: P3.5 U1.39 | length 2088.5
  Bottom Layer w10: P3.5@2055,2975.47 cw(c2055,2916.26) 2096.87,2958.13 cw(c2138.74,3000) P3.5@2079.53,3000 ; P3.5@2055,2985.47 cw(c2055,2950.4) 2079.8,2975.2 cw(c2104.6,3000) P3.5@2069.53,3000 ; P3.5@2055,3000 2151.42,2903.58 2536.42,2903.58 2614.84,2982 2813,2982 2908.5,3077.5 3146.5,3077.5 3170,3054 3170,3000 3192,2978 3572,2978 U1.39@3620,2930 ; U1.39@3592.5,2930 ccw(c3526.11,2930) 3573.05,2976.95 ccw(c3620,3023.89) U1.39@3620,2957.5 ; U1.39@3602.5,2930 ccw(c3560.25,2930) 3590.13,2959.87 ccw(c3620,2989.75) U1.39@3620,2947.5
40: P3.4 U1.40 | length 4404.2
  Top Layer w10: v1(2283,3100) 2361,3178 2361,3480 2435,3554 2548,3554 2594,3600 v1(2594,3937) ; v1@2283,3120 ccw(c2283,3168.28) 2317.14,3134.14 ccw(c2351.28,3100) v1@2303,3100 ; v1@2579.86,3922.86 cw(c2545.72,3888.72) 2594,3888.72 cw(c2642.28,3888.72) v1@2608.14,3922.86 ; U1.40@3520,3030 3655,3165 3655,3263 3600,3318 3600,3442 v1(3553,3489) ; U1.40@3520,3047.5 ccw(c3520,3089.75) 3549.87,3059.87 ccw(c3579.75,3030) U1.40@3537.5,3030 ; U1.40@3520,3057.5 ccw(c3520,3123.89) 3566.95,3076.95 ccw(c3613.89,3030) U1.40@3547.5,3030 ; v1@3553,3469 cw(c3553,3420.72) 3587.14,3454.86 cw(c3621.28,3489) v1@3573,3489
  Bottom Layer w10: P3.4@2055,3100 v1(2283,3100) ; P3.4@2065.27,3089.73 cw(c2090.07,3064.93) 2090.07,3100 cw(c2090.07,3135.07) P3.4@2065.27,3110.27 ; P3.4@2072.34,3082.66 cw(c2114.21,3040.79) 2114.21,3100 cw(c2114.21,3159.21) P3.4@2072.34,3117.34 ; v1@2268.86,3085.86 ccw(c2234.72,3051.72) 2234.72,3100 ccw(c2234.72,3148.28) v1@2268.86,3114.14 ; v1(2594,3937) 2666,3957 3003.71,3957 3162.71,3798 3399.85,3798 3477.85,3720 3477.85,3610.72 3491.57,3597 3713,3597 3820,3490 3820,3448 3797,3425 3750,3425 3714.91,3460.09 3581.91,3460.09 ; v1@2603.84,3954.41 ccw(c2627.6,3996.45) 2640.52,3949.92 ccw(c2653.45,3903.4) v1@2611.41,3927.16 ; v1(3553,3489) 3581.91,3460.09 ; v1@3555.49,3469.16 cw(c3559.44,3437.63) 3581.9,3460.1 ; v1@3572.84,3486.51 ccw(c3604.37,3482.56) 3581.9,3460.1
41: P3.3 U1.41 | length 2520.1
  Bottom Layer w10: P3.3@2055,3175.47 cw(c2055,3116.26) 2096.87,3158.13 cw(c2138.74,3200) P3.3@2079.53,3200 ; P3.3@2055,3185.47 cw(c2055,3150.4) 2079.8,3175.2 cw(c2104.6,3200) P3.3@2069.53,3200 ; P3.3@2055,3200 2110.66,3144.34 2620,3144.34 2647.44,3171.78 2647.44,3220 2660,3232.56 2732.56,3232.56 2785.12,3180 2911.78,3180 2947.44,3144.34 3679.66,3144.34 3692,3132 3692,2894 3680,2882 3568,2882 U1.41@3520,2930 ; U1.41@3520,2902.5 cw(c3520,2836.11) 3566.95,2883.05 cw(c3613.89,2930) U1.41@3547.5,2930 ; U1.41@3520,2912.5 cw(c3520,2870.25) 3549.87,2900.13 cw(c3579.75,2930) U1.41@3537.5,2930
GCLK1: P4.1 U1.43 | length 774.4
  Top Layer w10: P4.1@3175,3210 3202,3210 3228,3236 ; P4.1@3177.33,3213.88 ccw(c3191.04,3236.73) 3209.89,3217.89 ; P4.1@3182.48,3222.46 ccw(c3197.84,3248.05) 3218.94,3226.94 ; P4.1@3187.62,3231.03 ccw(c3204.63,3259.37) 3228,3236 ; U1.43@3392.5,2930 ccw(c3326.11,2930) 3373.05,2976.95 ccw(c3420,3023.89) U1.43@3420,2957.5 ; U1.43@3402.5,2930 ccw(c3360.25,2930) 3390.13,2959.87 ccw(c3420,2989.75) U1.43@3420,2947.5 ; U1.43@3420,2930 3372,2978 3372,3153 3289,3236 3228,3236
GCLRN: R7.1 S1.1 U1.1 | length 2106.3
  Top Layer w10: v1@3243.37,3177.96 cw(c3222.54,3134.4) 3268.07,3150.47 cw(c3313.6,3166.54) v1@3270.04,3187.37 ; v1(3252,3196) 3270,3145 3272,2978 U1.1@3320,2930 ; U1.1@3292.5,2930 ccw(c3226.11,2930) 3273.05,2976.95 ccw(c3320,3023.89) U1.1@3320,2957.5 ; U1.1@3302.5,2930 ccw(c3260.25,2930) 3290.13,2959.87 ccw(c3320,2989.75) U1.1@3320,2947.5
  Bottom Layer w10: S1.1@2435,3413.58 cw(c2435,3337.73) 2488.63,3391.37 cw(c2542.27,3445) S1.1@2466.42,3445 ; S1.1@2435,3423.58 cw(c2435,3371.88) 2471.56,3408.44 cw(c2508.12,3445) S1.1@2456.42,3445 ; S1.1@2435,3445 2491.02,3388.98 R7.1@2690,3388.98 2774.98,3304 2921,3304 2950,3333 3080,3333 3130,3283 3130,3165 3221,3165 ; R7.1@2674.05,3373.02 ccw(c2635.54,3334.51) 2635.54,3388.98 ccw(c2635.54,3443.44) R7.1@2674.05,3404.93 ; R7.1@2681.12,3380.1 ccw(c2659.68,3358.66) 2659.68,3388.98 ccw(c2659.68,3419.3) R7.1@2681.12,3397.86 ; R7.1@2690,3366.42 cw(c2690,3311.95) 2728.51,3350.47 cw(c2767.02,3388.98) R7.1@2712.56,3388.98 ; R7.1@2690,3376.42 cw(c2690,3346.1) 2711.44,3367.54 cw(c2732.88,3388.98) R7.1@2702.56,3388.98 ; v1@3232.05,3194.59 cw(c3194.1,3191.9) 3221,3165 ; v1@3250.59,3176.05 ccw(c3247.9,3138.1) 3221,3165 ; v1(3252,3196) 3221,3165